# Altium PCB PCB1.PcbDoc
Units mm, origin at the board's own origin, x right, y up, seen from the top; angles counter-clockwise.
Board outline 174.12 x 136.86 mm, 2 copper layers (Top Layer, Bottom Layer); 102 components, 82 nets, 295 pads, 74 vias.
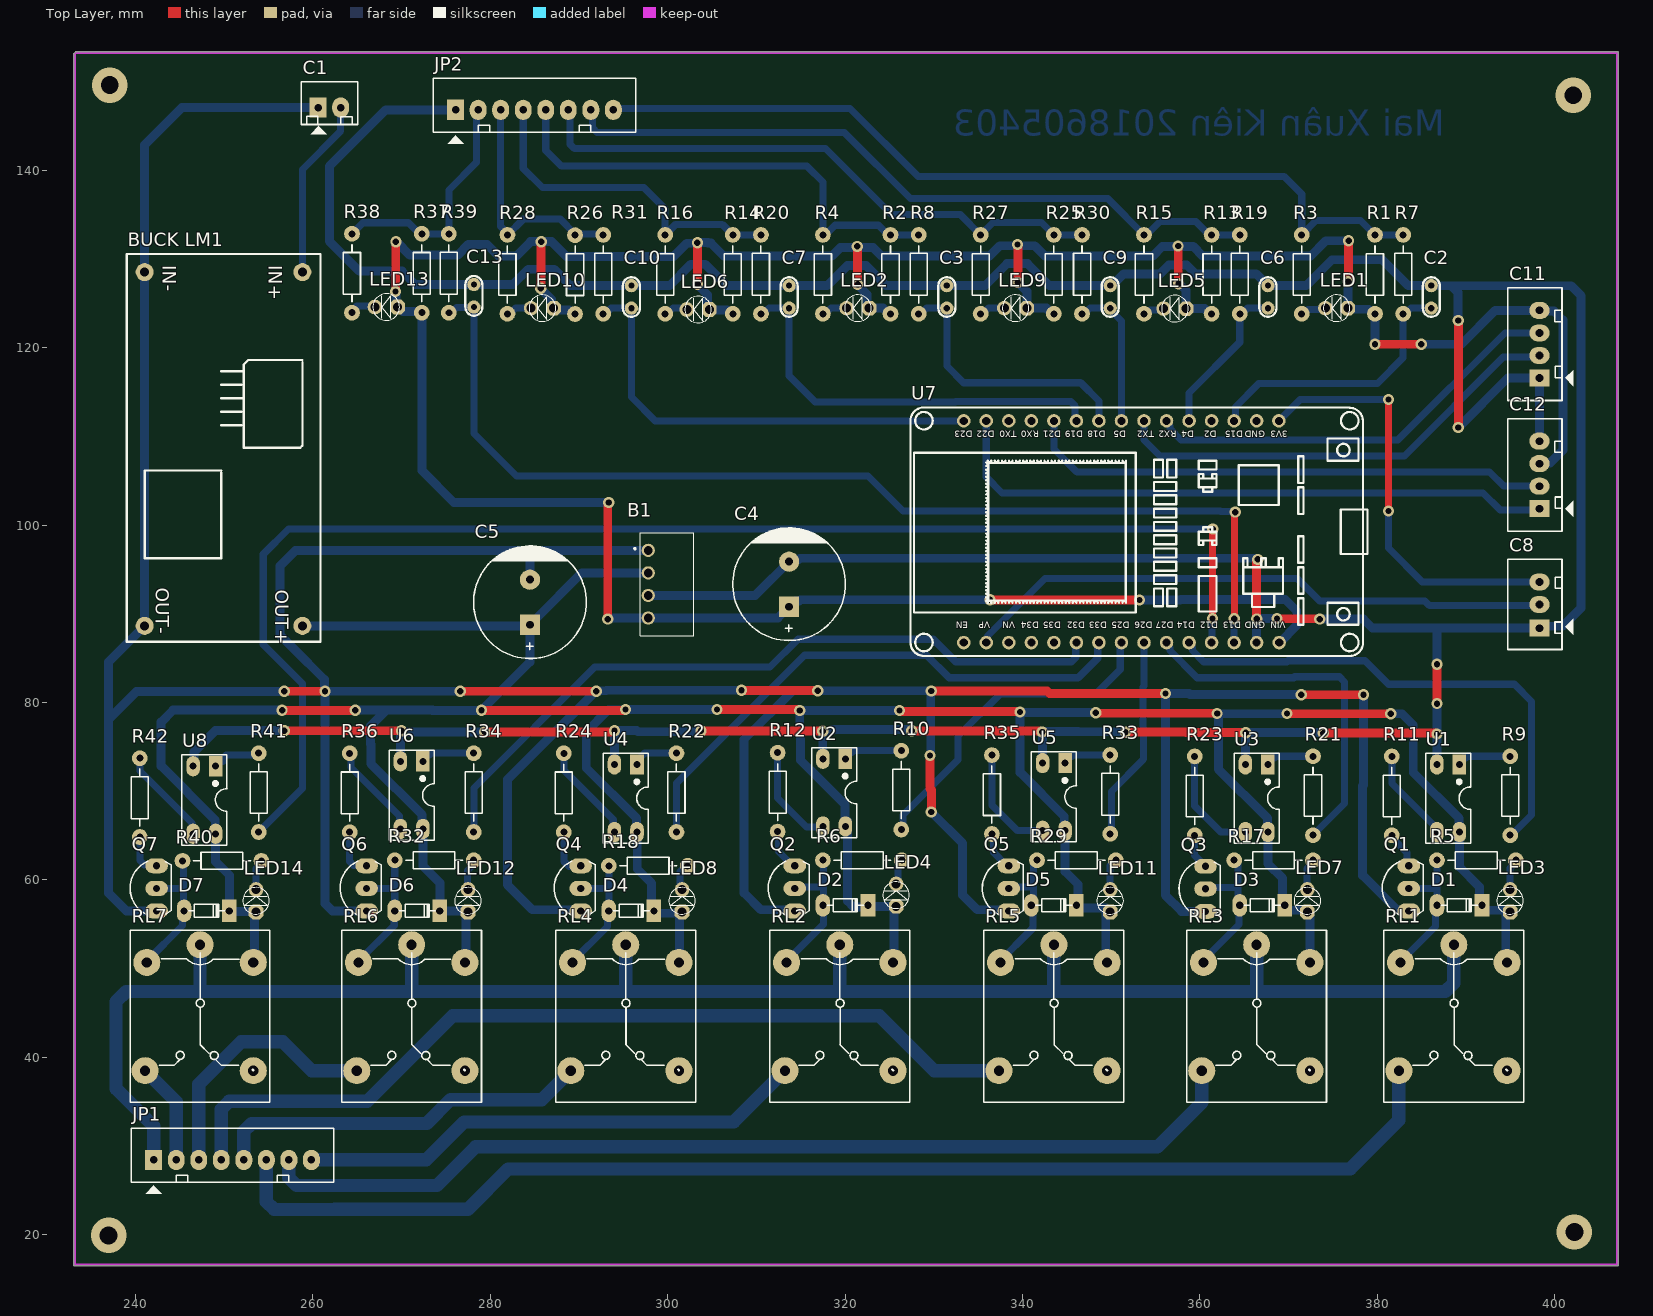
[diagram p0: Top Layer view]
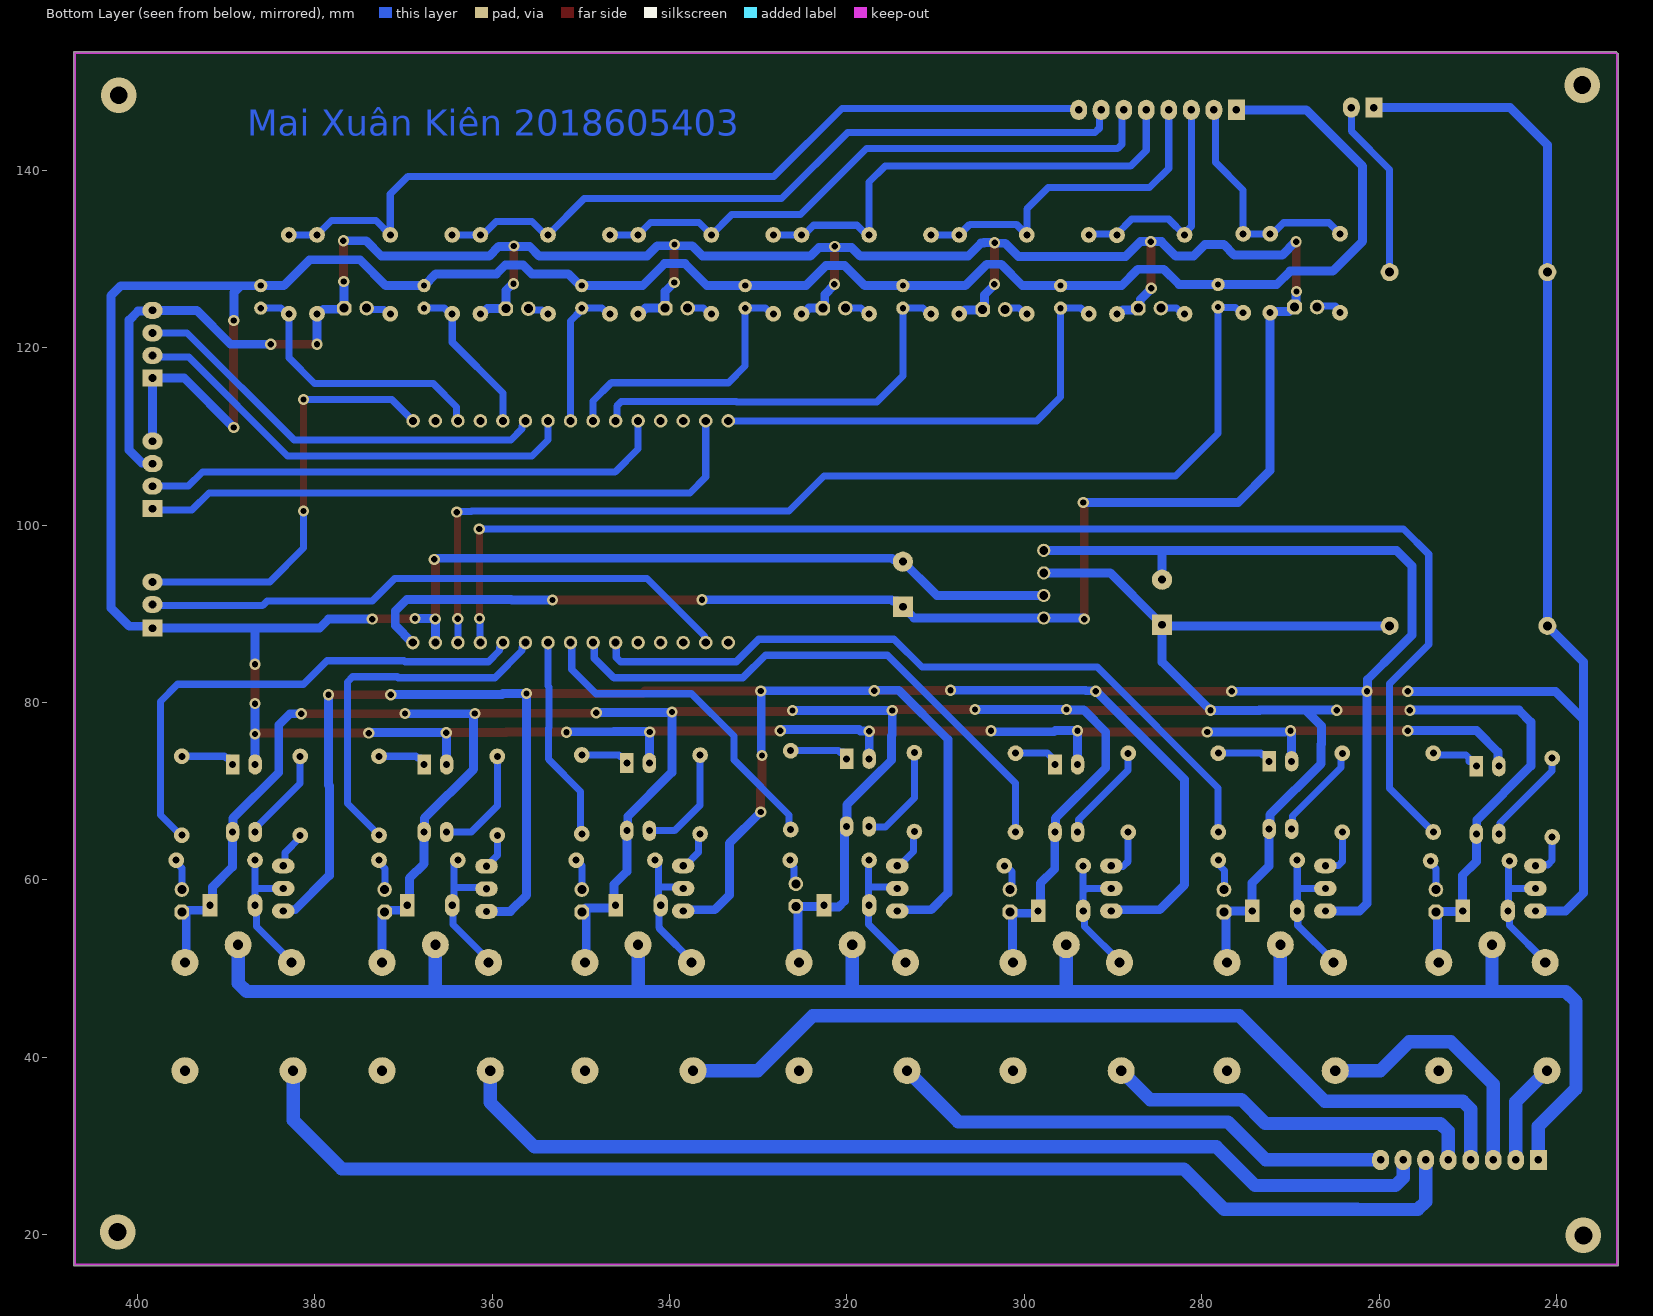
[diagram p1: Bottom Layer view, seen from below]
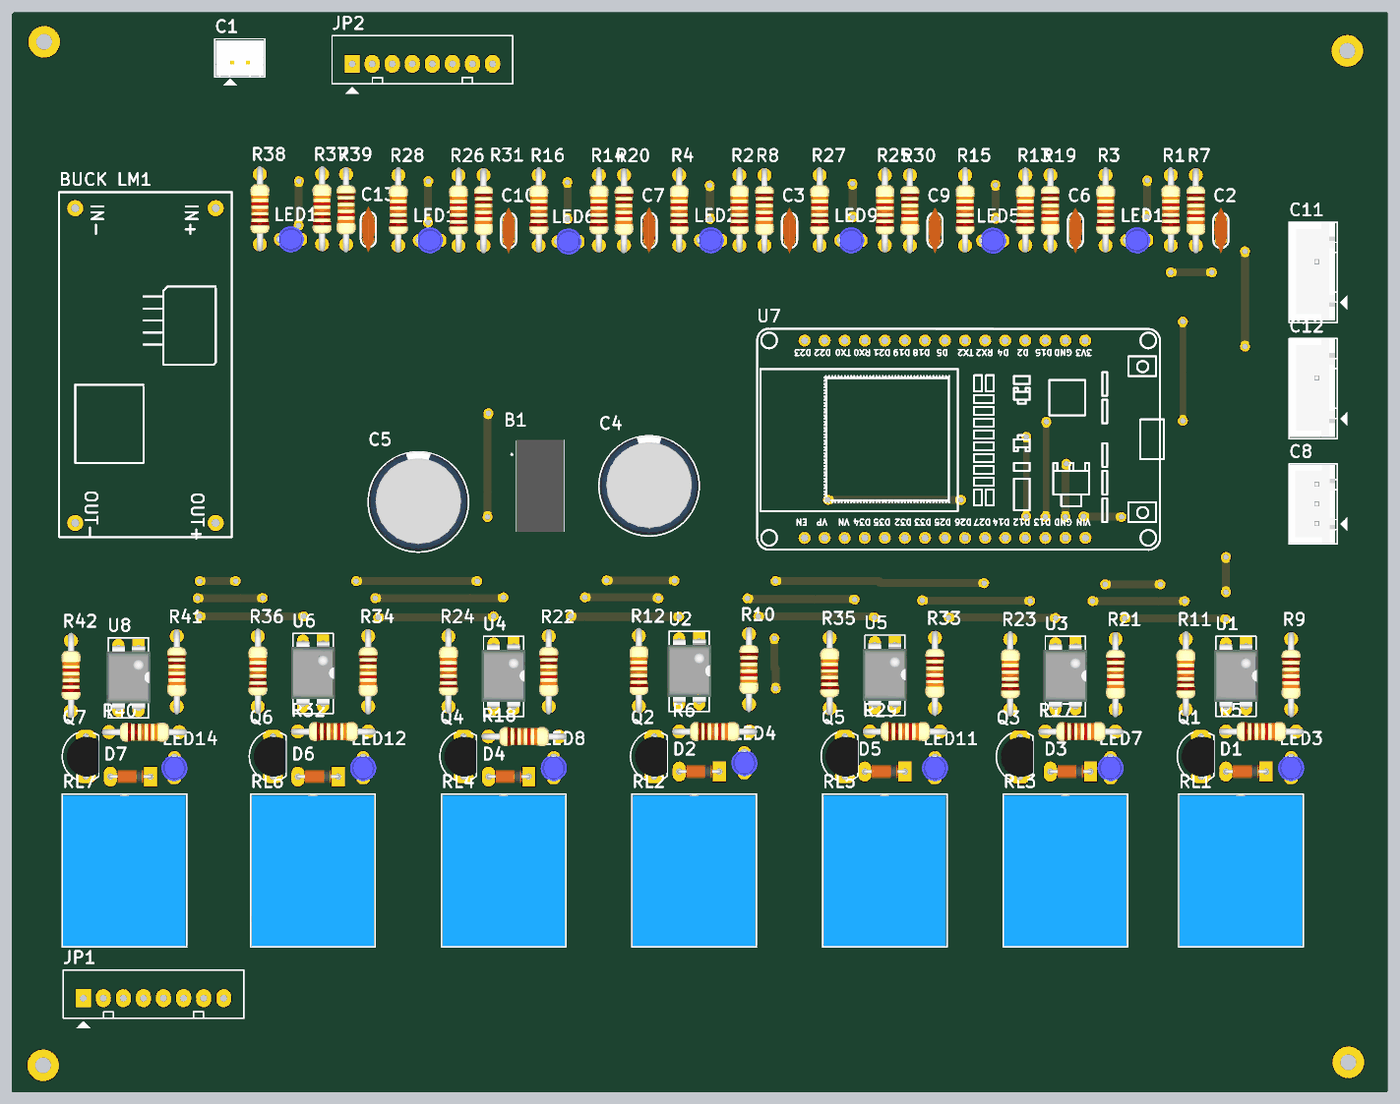
[diagram p2: 3D render of the assembled board from above, using the file's embedded part models]

## Layer stack, top to bottom
Top Solder: solder mask 0.0102, Solder Resist, Dk 3.5
Top Layer: signal copper 0.0356
Dielectric 1: dielectric 0.32, FR-4, Dk 4.8
Bottom Layer: signal copper 0.0356
Bottom Solder: solder mask 0.0102, Solder Resist, Dk 3.5

## Board outline
233.045,16.637 ccw(c233.172,16.637) 233.172,16.51 407.035,16.51 ccw(c407.035,16.637) 407.162,16.637 407.162,153.243 ccw(c407.035,153.243) 407.035,153.371 233.345,153.371 ccw(c233.345,153.243) 233.254,153.333 233.082,153.16 ccw(c233.171,153.071) 233.045,153.07

## Design rules (kind name [scope] priority, off if disabled: settings)
Clearance [All] p1: gap=1 ignorepadtopadclearanceinfootprint=FALSE
PolygonConnect [All] p1: connectstyle=Relief reliefconductorwidth=0.254 reliefentries=4 polygonreliefangle="90 Angle" airgapwidth=0.254
RoutingVias [All] p1: holewidth=0.711 width=1.27 viastyle="Through Hole" minholewidth=0.711 minwidth=1.27 maxholewidth=0.711 maxwidth=1.27
SolderMaskExpansion [All] p1: expansion=0.102 istentingtop=FALSE
Width RL_OUT [((InNet('OUT_RL0') OR InNet('OUT_RL1') OR InNet('OUT_RL2') OR InNet('OUT_RL3') OR InNet('OUT_RL4') OR InNet('OUT_RL5') OR InNet('OUT_RL6')))] p1: maxlimit=1.5 minlimit=1.5 preferedwidth=1.5
Width GND_ISO [InNet('GND_ISO')] p2: maxlimit=1 minlimit=1 preferedwidth=1
Width COM_O [InNet('COM_O')] p3: maxlimit=1.5 minlimit=1.5 preferedwidth=1.5
Width VCC_ISO [InNet('VCC5_ISO')] p4: maxlimit=1 minlimit=1 preferedwidth=1
Width GND [InNet('GND')] p5: maxlimit=1 minlimit=1 preferedwidth=1
Width VCC [InNet('VCC5')] p6: maxlimit=1 minlimit=1 preferedwidth=1
Width SIGNAL [All] p7: maxlimit=0.8 minlimit=0.8 preferedwidth=0.8
30 further rules are at their usual default settings.

## Components (designator, comment, footprint, x,y, rotation, side; value= is the part's Value field where it differs from the comment)
B1 "B0505S1W" B0505S1W 297.815,97.155 r270 top
"BUCK LM1" "Buck LM2596" "BUCK LM2596" 250.698,108.966 r270 top
C1 "Header2" Header2 260.604,147.066 r0 top
C2 "104" "tu gom" 386.08,125.73 r90 top
C3 "104" "tu gom" 331.47,125.73 r90 top
C4 "Cap Pol3" CP2/5 313.69,90.805 r90 top value=C?
C5 "Cap Pol3" CP2/5 284.48,88.773 r90 top value=C?
C6 "104" "tu gom" 367.665,125.73 r90 top
C7 "104" "tu gom" 313.69,125.73 r90 top
C8 "ADC1" Header3 398.272,88.519 r90 top
C9 "104" "tu gom" 349.885,125.73 r90 top
C10 "104" "tu gom" 295.91,125.73 r90 top
C11 "UART2" Header4 398.272,116.586 r90 top
C12 "LCD_I2C" Header4 398.272,101.854 r90 top
C13 "104" "tu gom" 278.155,125.854 r90 top
D1 "100v" "DIODE 0.5A" 389.255,57.15 r180 top
D2 "100v" "DIODE 0.5A" 320.04,57.15 r180 top
D3 "100v" "DIODE 0.5A" 367.03,57.15 r180 top
D4 "100v" "DIODE 0.5A" 295.91,56.515 r180 top
D5 "100v" "DIODE 0.5A" 343.535,57.15 r180 top
D6 "100v" "DIODE 0.5A" 271.78,56.515 r180 top
D7 "100v" "DIODE 0.5A" 248.031,56.515 r180 top
JP1 "JP8" Header8 242.062,28.448 r0 top value="Connector 8"
JP2 "JP8" Header8 276.098,146.812 r0 top value="Connector 8"
LED1 "LED 3mm" LED-3MM-BLUE 375.285,124.46 r180 top
LED2 "LED 3mm" LED-3MM-BLUE 321.31,124.46 r180 top
LED3 "LED 3mm" LED-3MM-BLUE 394.97,57.785 r90 top
LED4 "LED 3mm" LED-3MM-BLUE 325.755,58.42 r90 top
LED5 "LED 3mm" LED-3MM-BLUE 357.048,124.409 r180 top
LED6 "LED 3mm" LED-3MM-BLUE 303.301,124.308 r180 top
LED7 "LED 3mm" LED-3MM-BLUE 372.11,57.785 r90 top
LED8 "LED 3mm" LED-3MM-BLUE 301.625,57.785 r90 top
LED9 "LED 3mm" LED-3MM-BLUE 339.09,124.46 r180 top
LED10 "LED 3mm" LED-3MM-BLUE 285.75,124.46 r180 top
LED11 "LED 3mm" LED-3MM-BLUE 349.885,57.785 r90 top
LED12 "LED 3mm" LED-3MM-BLUE 277.495,57.785 r90 top
LED13 "LED 3mm" LED-3MM-BLUE 268.148,124.586 r180 top
LED14 "LED 3mm" LED-3MM-BLUE 253.602,57.785 r90 top
Q1 "C1815" C1815_cam 383.54,59.055 r90 top
Q2 "C1815" C1815_cam 314.325,59.055 r90 top
Q3 "C1815" C1815_cam 360.629,59.004 r90 top
Q4 "C1815" C1815_cam 290.195,59.055 r90 top
Q5 "C1815" C1815_cam 338.455,59.055 r90 top
Q6 "C1815" C1815_cam 266.065,59.055 r90 top
Q7 "C1815" C1815_cam 242.386,59.055 r90 top
R1 "10K" R1/4W 379.73,132.715 r270 top value="R1/4W - 1K"
R2 "10K" R1/4W 325.12,132.715 r270 top value="R1/4W - 1K"
R3 "220R" R1/4W 371.475,132.715 r270 top value="R1/4W - 1K"
R4 "220R" R1/4W 317.5,132.715 r270 top value="R1/4W - 1K"
R5 "510R" R1/4W 395.605,62.23 r180 top value="R1/4W - 1K"
R6 "510R" R1/4W 326.39,62.23 r180 top value="R1/4W - 1K"
R7 "1K" R1/4W 382.905,123.825 r90 top value="R1/4W - 1K"
R8 "1K" R1/4W 328.295,123.825 r90 top value="R1/4W - 1K"
R9 "100R" R1/4W 394.97,65.055 r90 top value="R1/4W - 1K"
R10 "100R" R1/4W 326.339,65.687 r90 top value="R1/4W - 1K"
R11 "510R" R1/4W 381.635,73.929 r270 top value="R1/4W - 1K"
R12 "510R" R1/4W 312.395,74.346 r270 top value="R1/4W - 1K"
R13 "10K" R1/4W 361.315,132.715 r270 top value="R1/4W - 1K"
R14 "10K" R1/4W 307.34,132.715 r270 top value="R1/4W - 1K"
R15 "220R" R1/4W 353.695,132.715 r270 top value="R1/4W - 1K"
R16 "220R" R1/4W 299.72,132.715 r270 top value="R1/4W - 1K"
R17 "510R" R1/4W 372.745,62.23 r180 top value="R1/4W - 1K"
R18 "510R" R1/4W 302.26,61.595 r180 top value="R1/4W - 1K"
R19 "1K" R1/4W 364.49,123.825 r90 top value="R1/4W - 1K"
R20 "1K" R1/4W 310.515,123.825 r90 top value="R1/4W - 1K"
R21 "100R" R1/4W 372.745,65.055 r90 top value="R1/4W - 1K"
R22 "100R" R1/4W 300.99,65.405 r90 top value="R1/4W - 1K"
R23 "510R" R1/4W 359.41,73.929 r270 top value="R1/4W - 1K"
R24 "510R" R1/4W 288.29,74.28 r270 top value="R1/4W - 1K"
R25 "10K" R1/4W 343.535,132.715 r270 top value="R1/4W - 1K"
R26 "10K" R1/4W 289.56,132.691 r270 top value="R1/4W - 1K"
R27 "220R" R1/4W 335.28,132.715 r270 top value="R1/4W - 1K"
R28 "220R" R1/4W 281.94,132.715 r270 top value="R1/4W - 1K"
R29 "510R" R1/4W 350.52,62.23 r180 top value="R1/4W - 1K"
R30 "1K" R1/4W 346.71,123.825 r90 top value="R1/4W - 1K"
R31 "1K" R1/4W 292.735,123.825 r90 top value="R1/4W - 1K"
R32 "510R" R1/4W 278.13,62.23 r180 top value="R1/4W - 1K"
R33 "100R" R1/4W 349.885,65.205 r90 top value="R1/4W - 1K"
R34 "100R" R1/4W 278.13,65.405 r90 top value="R1/4W - 1K"
R35 "510R" R1/4W 336.55,74.079 r270 top value="R1/4W - 1K"
R36 "510R" R1/4W 264.16,74.28 r270 top value="R1/4W - 1K"
R37 "10K" R1/4W 272.288,132.842 r270 top value="R1/4W - 1K"
R38 "220R" R1/4W 264.414,132.842 r270 top value="R1/4W - 1K"
R39 "1K" R1/4W 275.336,123.942 r90 top value="R1/4W - 1K"
R40 "510R" R1/4W 254.203,62.154 r180 top value="R1/4W - 1K"
R41 "100R" R1/4W 253.898,65.405 r90 top value="R1/4W - 1K"
R42 "510R" R1/4W 240.504,73.731 r270 top value="R1/4W - 1K"
RL1 "Relay" RELAY_SRA_05VDC_SL_C 388.62,52.705 r270 top
RL2 "Relay" RELAY_SRA_05VDC_SL_C 319.405,52.705 r270 top
RL3 "Relay" RELAY_SRA_05VDC_SL_C 366.395,52.705 r270 top
RL4 "Relay" RELAY_SRA_05VDC_SL_C 295.275,52.705 r270 top
RL5 "Relay" RELAY_SRA_05VDC_SL_C 343.535,52.705 r270 top
RL6 "Relay" RELAY_SRA_05VDC_SL_C 271.145,52.705 r270 top
RL7 "Relay" RELAY_SRA_05VDC_SL_C 247.289,52.705 r270 top
U1 "PC817" DIP4/W0.3 389.255,73.028 r180 top
U2 "PC817" DIP4/W0.3 320.04,73.66 r180 top
U3 "PC817" DIP4/W0.3 367.665,73.028 r180 top
U4 "PC817" DIP4/W0.3 296.545,73.025 r180 top
U5 "PC817" DIP4/W0.3 344.805,73.178 r180 top
U6 "PC817" DIP4/W0.3 272.415,73.378 r180 top
U7 "ESP32_MODULE copy" ESP32-WIFIMODULE-FOOTPRINT 352.889,101.388 r90 top
U8 "PC817" DIP4/W0.3 249.047,72.829 r180 top

## Footprints (in the part's own frame and the unit in brackets; to place one, negate y for a bottom-side part, rotate by r counter-clockwise, add the part's x,y. Pads: shape width x height; smd on the part's side, far side on the other; paste and mask are expansions set on the pad)
B0505S1W [mm]
  round 1.5 hole 1: 1(0,0) 2(2.54,0) 3(5.08,0) 4(7.62,0)
  silkscreen extent -1.99,-1.6 9.61,5.1, body extent -1.99,-0.9 9.61,5.1, height 10.1
"BUCK LM2596" [mil]
  round 80 hole 40: 1(-770,320) 2(-770,-380) 3(800,-380) 4(800,320)
  silkscreen extent -850,-460 870,400
C1815_cam [mil]
  oval 66x100 hole 32: 1(-100,0) 2(0,0) 3(100,0)
  silkscreen extent -117,-65 120,118, body extent -109,-66 109,95, height 245
CP2/5 [mil]
  rect 90x90 hole 35: 1(0,0)
  round 90 hole 35: 2(200,0)
  silkscreen extent -150,-250 350,250, body extent -142,-246 350,246, height 984
"DIODE 0.5A" [mil] "Diode muoi, xung"
  oval 65x100 hole 32: 1(100,0)
  rect 65x100 hole 32: 2(-100,0)
  silkscreen extent -80,-30 80,28, body extent -108,-33 108,32, height 61
DIP4/W0.3 [mil]
  rect 60x90 hole 31: 1(0,0)
  oval 60x90 hole 31: 2(100,0) 3(100,300) 4(0,300)
  silkscreen extent -50,-50 150,350, body extent -59,-10 159,305, height 170
ESP32-WIFIMODULE-FOOTPRINT [mil]
  round 60 hole 36: 1(-575.9,768.25) 2(-575.9,668.25) 3(-575.9,568.25) 4(-575.9,468.25) 5(-575.9,368.25) 6(-575.9,268.25) 7(-575.9,168.25) 8(-575.9,68.25) 9(-575.9,-31.75) 10(-575.9,-131.75) 11(-575.9,-231.75) 12(-575.9,-331.75) 13(-575.9,-431.75) 14(-575.9,-531.75) 15(-575.9,-631.75) 16(408.35,-630.18) 17(408.35,-531.75) 18(408.35,-431.75) 19(408.35,-331.75) 20(408.35,-231.75) 21(408.35,-131.75) 22(408.35,-31.75) 23(408.35,68.25) 24(408.35,168.25) 25(408.35,268.25) 26(408.35,368.25) 27(408.35,468.25) 28(408.35,568.25) 29(408.35,668.25) 30(408.35,768.25)
  silkscreen extent -635,-1023 468,1005
Header2 [mil] "CON2"
  rect 75x90 hole 34: 1(0,0)
  oval 75x90 hole 34: 2(100,0)
  silkscreen extent -75,-118 175,115, body extent -68,-70 168,107, height 236
Header3 [mil] "CON 3"
  rect 75x90 hole 34: 1(-5,0)
  oval 75x90 hole 34: 2(100,0) 3(200,0)
  silkscreen extent -100,-150 300,140, body extent -95,-90 295,136, height 276
Header4 [mil] "CON4"
  rect 75x90 hole 34: 1(0,0)
  oval 75x90 hole 34: 2(100,0) 3(200,0) 4(300,0)
  silkscreen extent -100,-150 400,140, body extent -90,-90 398,136, height 276
Header8 [mil] "CON8"
  rect 75x90 hole 34: 1(0,0)
  oval 75x90 hole 34: 2(100,0) 3(200,0) 4(300,0) 5(400,0) 6(500,0) 7(600,0) 8(700,0)
  silkscreen extent -100,-150 800,140
LED-3MM-BLUE [mil]
  oct 65x65 hole 40: 1(-55,0)
  round 65 hole 40: 2(45,0)
  silkscreen extent -64,-59 54,59, body extent -72,-65 54,65, height 184
R1/4W [mil]
  round 70 hole 31: 1(0,0) 2(350,0)
  silkscreen extent 48,-38 302,38, body extent -40,-47 386,47, height 111
RELAY_SRA_05VDC_SL_C [mil] "Relay SPDT, 5 pin, 10A,W 650mil, L 800mil, H 800mil"
  round 120 hole 45: 1(559.06,-243.78) 2(559.06,236.22) 3(78.74,236.22) 4(0,0) 5(78.74,-236.22)
  silkscreen extent -63,-311 700,310, body extent -55,-306 697,304, height 602
"tu gom" [mm] "Tu gom mini"
  round 1.5 hole 0.7: 1(-1.27,0) 2(1.27,0)
  silkscreen extent -2.25,-0.97 2.22,0.97, body extent -2.92,-0.85 2.92,0.85, height 6.12

## Part data
B1: "Power Supply", Manufacturer_Name=Mornsun, Manufacturer_Part_Number=B0505S-1W, Datasheet Link=https://www.mornsun-power.com/uploads/pdf/B_D-1W.pdf, Height=10.41mm
C1: "Header IDC, 2 x 1 Pin Vertical 2.54mm Pitch (Non-Boxed, Male)", Manufacturer="W¨¹rth Elektronik eiSos GmbH", partNo=613002143121, ComponentLink1 Description=Manufacturer, ComponentLink1URL=http://www.we-online.com, ComponentLink2 Description=Datasheet, ComponentLink2URL=http://katalog.we-online.de/em/datasheet/6130xx143121.pdf, Created by="Karrer Zheng", Created Date="29 March 2013", NoPins=02
C2 C3 C6 C7 C9 C10 C13: library part "Tu gom 104 50V", "Cắm", Chung_Loai=Cắm, Don_Vi=Con, Ma_Hang=MH004761, So_Chan=2, Ten_Linh_Kien="Tụ gốm 104 100nF 50V"
C4 C5: "Polarized Capacitor (Surface Mount)", LatestRevisionDate=17-Jul-2002, LatestRevisionNote="Re-released for DXP Platform.", PackageReference=C0805, Publisher="Altium Limited"
C8: library part Header3, "Header IDC, 3 x 1 Pin Vertical 2.54mm Pitch (Non-Boxed, Male)", Manufacturer="W¨¹rth Elektronik eiSos GmbH", partNo=613002143121, ComponentLink1 Description=Manufacturer, ComponentLink1URL=http://www.we-online.com, ComponentLink2 Description=Datasheet, ComponentLink2URL=http://katalog.we-online.de/em/datasheet/6130xx143121.pdf, Created by="Karrer Zheng", Created Date="29 March 2013", NoPins=02
C11 C12: library part Header4, "Header IDC, 4 x 1 Pin Vertical 2.54mm Pitch (Non-Boxed, Male)", Manufacturer="W¨¹rth Elektronik eiSos GmbH", partNo=613002143121, ComponentLink1 Description=Manufacturer, ComponentLink1URL=http://www.we-online.com, ComponentLink2 Description=Datasheet, ComponentLink2URL=http://katalog.we-online.de/em/datasheet/6130xx143121.pdf, Created by="Karrer Zheng", Created Date="29 March 2013", NoPins=02
D1 D2 D3 D4 D5 D6 D7: library part "Diode 1N4148", "Cắm", Chung_Loai=Cắm, Don_Vi=Con, Ma_Hang=MH001065, Ten_Linh_Kien="Diode 1N4148 DO35 450mA 100V ( 1N4148 DIP)"
JP1 JP2: library part Header8, "Connector 8"
LED1 LED2 LED3 LED4 LED5 LED6 LED7 LED8 LED9 LED10 LED11 LED12 LED13 LED14: library part "LED 3mm Xanh Duong", "Cắm", Chung_Loai=Cắm, Don_Vi=Con, Ma_Hang=MH009003, Ten_Linh_Kien="LED 3MM Xanh Dương SS (1000c)"
Q1 Q2 Q3 Q4 Q5 Q6 Q7: "NPN 600mW, ECB"
R1 R2 R3 R4 R5 R6 R7 R8 R9 R10 R11 R12 R13 R14 R15 R16 R17 R18 R19 R20 R21 R22 R23 R24 R25 R26 R27 R28 R29 R30 R31 R32 R33 R34 R35 R36 R37 R38 R39 R40 R41 R42: library part R1/4W, "Resistor 1/4W"
RL1 RL2 RL3 RL4 RL5 RL6 RL7: library part RL_SRA-05VDC-SL-C, "Relay 5 Chan", Ma_Hang=MH009374, Ten="Relay 5V10A SRD-05VDC-SL-C Chính Hãng"
U1 U2 U3 U4 U5 U6 U8: "Single Opto"

## Via types
v1: diameter 1.27, hole 0.711, Top Layer to Bottom Layer, 70 vias
v2: diameter 4, hole 2, Top Layer to Bottom Layer, 4 vias

## Nets (pads, with @x,y where several pads share a name; then routed paths per layer and width w, separated by ;. In a path a pad name is that pad's centre, name@x,y a point inside that pad or via, vN(x,y) a via of type N, cw(c..) or ccw(c..) an arc to the next point about the centre after c; other vN are vias at no path point)
ADC1_0: C8.2 U7.2 | length 67
  Bottom Layer w0.8: U7.2 336.054,86.899 336.054,87.515 342.519,93.98 370.967,93.98 373.504,91.443 385.346,91.443 385.857,90.932 398.145,90.932 C8.2
COM_O: JP1.1 RL1.4 RL2.4 RL3.4 RL4.4 RL5.4 RL6.4 RL7.4 | length 207.3
  Bottom Layer w1.5: JP1.1 242.062,32.231 237.823,36.471 237.823,46.307 238.947,47.431 247.289,47.431 ; RL7.4 247.289,47.431 ; RL6.4 271.145,47.558 271.272,47.431 ; RL4.4 295.275,47.558 295.148,47.431 ; RL2.4 319.405,47.494 319.341,47.431 ; RL5.4 343.535,47.431 ; 366.395,47.498 RL3.4 ; RL1.4 388.62,48.377 387.674,47.431 366.395,47.431 343.535,47.431 ; 247.289,47.431 271.272,47.431 ; 271.272,47.431 295.148,47.431 ; 295.148,47.431 319.341,47.431 ; 319.341,47.431 343.535,47.431
GND: "BUCK LM1.2" "BUCK LM1.3" B1.1 C1.1 C5.2 Q1.1 Q2.1 Q3.1 Q4.1 Q5.1 Q6.1 Q7.1 | length 503
  Top Layer w1: v1(256.794,81.28) v1(261.366,81.28) ; v1(276.606,81.28) v1(291.942,81.28) ; v1(308.331,81.382) 308.356,81.356 316.89,81.356 v1(316.916,81.331) ; v1(329.565,74.041) 329.565,70.297 329.721,70.14 v1(329.721,67.662) ; v1(329.699,81.305) 342.744,81.305 343.024,81.026 v1(356.108,81.026) ; v1(371.422,80.875) v1(378.435,80.875)
  Bottom Layer w1: Q7.1 238.989,56.515 236.982,58.522 236.982,78.105 ; v1(256.794,81.28) 256.743,81.229 240.106,81.229 236.982,78.105 ; C1.1 245.237,147.066 241.046,142.875 241.046,128.524 241.046,88.646 236.982,84.582 236.982,78.105 ; Q6.1 262.206,56.515 261.366,57.355 v1(261.366,81.28) ; v1(276.606,81.28) v1(261.366,81.28) ; C5.2 284.48,97.155 ; Q4.1 290.066,56.644 284.757,56.644 281.94,59.461 281.94,71.308 291.912,81.28 v1(291.942,81.28) 291.994,81.332 293.041,81.332 293.092,81.383 308.206,81.383 308.207,81.382 v1(308.331,81.382) ; B1.1 284.48,97.155 ; Q2.1 314.196,56.644 310.513,56.644 308.61,58.547 308.61,75.841 314.15,81.382 316.865,81.382 v1(316.916,81.331) 329.574,81.331 329.6,81.305 v1(329.699,81.305) 329.651,81.257 329.651,74.2 329.565,74.114 v1(329.565,74.041) ; v1(329.721,67.662) 333.248,64.135 333.248,58.293 334.897,56.644 338.326,56.644 Q5.1 ; Q3.1 357.937,56.464 356.108,58.293 v1(356.108,81.026) 358.759,81.026 358.887,80.898 371.399,80.898 v1(371.422,80.875) ; v1(378.435,80.875) 378.435,70.7 378.333,70.599 378.333,60.523 382.212,56.644 383.541,56.644 Q1.1@383.576,56.609 ; v1(261.366,81.28) 261.314,81.332 261.314,82.602 257.786,86.13 257.784,86.13 256.31,87.604 256.31,95.401 258.064,97.155 284.48,97.155
GND_ISO: B1.3 C2.2 C3.2 C4.2 C6.2 C7.2 C8.1 C9.2 C10.2 C11.1 C12.4 C13.2 JP2.1 U1.2 U2.2 U3.2 U4.2 U5.2 U6.2 U7.14 U8.2 | length 542.2
  Top Layer w1: v1(256.794,76.835) 256.804,76.825 269.992,76.825 v1(270.002,76.816) ; v1(279.376,76.684) 293.781,76.684 293.932,76.835 v1(294.005,76.835) ; v1(303.757,76.834) 303.807,76.784 317.463,76.784 v1(317.489,76.759) ; v1(327.516,76.81) 341.921,76.81 341.997,76.734 342.188,76.734 v1(342.24,76.683) ; v1(351.617,76.663) 358.368,76.663 358.426,76.605 v1(365.154,76.605) ; v1(366.395,89.432) 366.395,95.939 366.522,96.066 v1(366.522,96.139) ; v1(368.684,89.484) 368.722,89.446 373.469,89.446 v1(373.507,89.408) ; v1(373.893,76.557) 386.539,76.557 386.642,76.454 v1(386.715,76.454) ; v1(386.715,79.883) v1(386.715,84.328) ; v1(389.128,110.998) v1(389.128,123.063)
  Bottom Layer w1: U8.2 246.607,72.93 246.607,74.416 249.026,76.835 v1(256.794,76.835) ; U6.2@269.875,73.66 269.875,76.616 270.002,76.743 v1(270.002,76.816) ; v1@270.609,76.684 v1(279.376,76.684) ; JP2.1 268.224,146.812 261.874,140.462 261.874,132.003 265.244,128.633 270.045,128.633 271.555,127.124 C13.2 282.556,127.124 284.281,128.85 287.194,128.85 289.044,127 C10.2 300.212,127 302.625,129.413 304.241,129.413 306.654,127 C7.2 317.992,127 320.279,129.287 322.341,129.287 324.628,127 C3.2 335.772,127 338.263,129.491 340.552,129.491 343.043,127 C9.2 350.02,127 C9.2@350.116,127.096 ; U4.2 v1(294.005,76.835) 296.513,76.835 296.64,76.708 303.559,76.708 303.684,76.834 v1(303.757,76.834) ; B1.3 309.88,92.075 313.936,96.131 314.784,96.131 314.919,96.266 366.204,96.266 366.279,96.191 366.47,96.191 v1(366.522,96.139) ; U2.2@317.5,74.562 317.489,74.573 v1(317.489,76.759) 317.541,76.81 318.472,76.81 318.628,76.966 327.287,76.966 327.442,76.81 v1(327.516,76.81) ; U5.2 342.252,73.19 342.252,76.67 v1(342.24,76.683) 342.289,76.732 346.28,76.732 346.304,76.708 349.142,76.708 351.572,76.708 v1(351.617,76.663) ; C9.2@350.338,127.25 351.414,128.326 355.513,128.326 356.524,129.337 358.486,129.337 359.497,128.326 366.339,128.326 C6.2 371.967,127 374.887,129.92 380.57,129.92 383.489,127 C2.2 386.101,126.979 388.33,126.979 ; U3.2 365.14,73.042 365.14,76.59 v1(365.154,76.605) ; v1@365.14,76.613 365.154,76.628 373.749,76.628 373.819,76.557 v1(373.893,76.557) ; U7.14 v1(366.395,89.432) 366.421,89.458 368.658,89.458 v1(368.684,89.484) ; v1(373.507,89.408) 378.44,89.408 379.439,88.409 386.715,88.409 ; U1.2@386.715,73.66 v1(386.715,76.454) v1(386.715,79.883) ; v1(386.715,84.328) 386.715,88.409 ; v1(389.128,110.998) 394.716,116.586 C11.1 C12.4 ; v1(389.128,123.063) 389.103,123.088 389.103,126.206 388.33,126.979 ; 386.715,88.409 386.736,88.388 394.695,88.388 394.699,88.392 C8.1 398.486,88.606 400.899,88.606 402.971,90.678 402.971,125.857 401.849,126.979 388.33,126.979
IN_0: C13.1 R39.1 U7.13 | length 121.7
  Top Layer w0.8: U7.13 U7.13@363.918,86.823 ; v1(363.855,89.433) 363.918,89.497 363.918,101.406 v1(363.982,101.47)
  Bottom Layer w0.8: R39.1 275.601,123.942 276.205,124.547 278.118,124.547 C13.1 278.155,110.338 282.956,105.537 322.58,105.537 326.517,101.6 362.285,101.6 362.325,101.56 363.892,101.56 v1(363.982,101.47) ; U7.13 v1(363.855,89.433)
IN_1: C2.1 R7.1 U7.18 | length 31.2
  Bottom Layer w0.8: U7.18 363.994,111.899 363.994,113.335 366.632,115.973 380.006,115.973 382.902,118.869 382.902,121.239 382.905,121.242 R7.1 383.17,123.825 383.805,124.46 C2.1
IN_2: C6.1 R19.1 U7.20 | length 17.9
  Bottom Layer w0.8: U7.20 358.775,114.901 364.49,120.616 R19.1 364.755,123.825 365.39,124.46 C6.1
IN_3: C9.1 R30.1 U7.23 | length 16.7
  Bottom Layer w0.8: R30.1 346.975,123.825 347.61,124.46 C9.1 349.885,124.271 351.155,123.001 U7.23
IN_4: C3.1 R8.1 U7.24 | length 31
  Bottom Layer w0.8: R8.1 328.56,123.825 329.195,124.46 C3.1 331.47,117.932 333.35,116.053 346.558,116.053 348.615,113.995 U7.24
IN_5: C7.1 R20.1 U7.25 | length 46.5
  Bottom Layer w0.8: R20.1 310.78,123.825 311.415,124.46 C7.1 313.69,116.84 316.636,113.894 332.451,113.894 332.479,113.922 345.439,113.922 345.936,113.425 345.936,111.899 U7.25
IN_6: C10.1 R31.1 U7.30 | length 52
  Bottom Layer w0.8: R31.1 293,123.825 293.635,124.46 C10.1 295.91,114.427 298.577,111.76 U7.30
"NetBUCK LM1_1": "BUCK LM1.1" C1.2 | length 20.3
  Bottom Layer w0.8: 258.826,128.524 258.826,140.101 263.144,144.419 C1.2
NetD1_1: D1.1 Q1.2 R5.2 RL1.5 | length 16.6
  Bottom Layer w0.8: RL1.5@382.479,50.534 382.479,50.699 386.552,54.772 D1.1@386.552,57.15 ; Q1.2 383.565,59.03 386.715,59.03 ; D1.1 386.715,59.03 ; R5.2 386.715,59.03
NetD2_1: D2.1 Q2.2 R6.2 RL2.5 | length 16.4
  Bottom Layer w0.8: RL2.5@313.509,50.754 313.509,50.944 317.576,55.011 317.576,59.411 ; Q2.2@314.39,59.225 317.39,59.225 317.576,59.411 ; R6.2@317.576,62.205 317.576,59.411
NetD3_1: D3.1 Q3.2 R17.2 RL3.5 | length 17.2
  Bottom Layer w0.8: RL3.5@359.963,50.398 359.963,50.534 364.414,54.984 364.414,57.04 364.286,57.169 364.286,59.106 ; Q3.2@361.06,59.149 364.243,59.149 364.286,59.106 ; R17.2@364.157,62.362 364.286,62.233 364.286,59.106
NetD4_1: D4.1 Q4.2 R18.2 RL4.5 | length 16
  Bottom Layer w0.8: RL4.5@289.077,50.534 289.077,50.643 293.207,54.772 293.207,56.602 D4.1@293.116,56.693 ; Q4.2 293.13,59.055 293.13,58.928 ; D4.1 R18.2
NetD5_1: D5.1 Q5.2 R29.2 RL5.5 | length 16.6
  Bottom Layer w0.8: RL5.5@337.236,50.5 337.236,50.635 341.097,54.496 341.097,54.588 341.173,54.664 341.173,57.117 341.249,57.193 341.249,59.284 ; Q5.2@338.333,59.225 341.19,59.225 341.249,59.284 ; R29.2@341.325,62.463 341.249,62.387 341.249,59.284
NetD6_1: D6.1 Q6.2 R32.2 RL6.5 | length 16.3
  Bottom Layer w0.8: RL6.5@265.107,50.802 269.175,54.871 269.175,56.45 D6.1 269.24,59.03 ; Q6.2 266.09,59.03 269.24,59.03 ; R32.2 269.24,59.03
NetD7_1: D7.1 Q7.2 R40.2 RL7.5 | length 16.3
  Bottom Layer w0.8: RL7.5 241.289,50.84 245.328,54.88 245.328,56.352 D7.1 245.402,56.604 245.402,59.055 ; Q7.2 245.402,59.055 ; R40.2 245.402,62.065 245.402,59.055
NetLED1_2: LED1.2 R3.2 | length 2.9
  Bottom Layer w0.8: R3.2 371.74,123.825 372.212,124.297 373.979,124.297 LED1.2
NetLED2_2: LED2.2 R4.2 | length 2.9
  Bottom Layer w0.8: R4.2 317.765,123.825 318.4,124.46 LED2.2
NetLED3_2: LED3.2 R5.1 | length 3.6
  Bottom Layer w0.8: LED3.2 394.97,61.33 395.605,61.965 R5.1
NetLED4_2: LED4.2 R6.1 | length 3
  Bottom Layer w0.8: LED4.2@325.822,59.487 325.985,59.65 325.985,61.459 326.466,61.94 R6.1@326.466,62.205
NetLED5_2: LED5.2 R15.2 | length 2.5
  Bottom Layer w0.8: R15.2 353.96,123.825 354.381,124.246 355.742,124.246 LED5.2
NetLED6_2: LED6.2 R16.2 | length 2.7
  Bottom Layer w0.8: R16.2 299.985,123.825 300.62,124.46 LED6.2@302.157,124.46
NetLED7_2: LED7.2 R17.1 | length 3.6
  Bottom Layer w0.8: LED7.2 372.059,58.979 372.059,61.28 372.745,61.965 R17.1
NetLED8_2: LED8.2 R18.1 | length 3.3
  Bottom Layer w0.8: LED8.2@301.39,58.788 301.39,60.94 302.034,61.584 R18.1@302.034,61.849
NetLED9_2: LED9.2 R27.2 | length 2.9
  Bottom Layer w0.8: R27.2 335.545,123.825 336.18,124.46 LED9.2
NetLED10_2: LED10.2 R28.2 | length 2.9
  Bottom Layer w0.8: R28.2 282.205,123.825 282.84,124.46 LED10.2
NetLED11_2: LED11.2 R29.1 | length 3.5
  Bottom Layer w0.8: LED11.2 349.885,61.633 350.333,62.081 R29.1@350.215,62.199
NetLED12_2: LED12.2 R32.1 | length 3.3
  Bottom Layer w0.8: LED12.2@277.42,58.915 277.42,61.067 278.064,61.711 R32.1@278.064,61.976
NetLED13_2: LED13.2 R38.2 | length 3.1
  Bottom Layer w0.8: R38.2 264.414,124.206 264.922,124.714 266.877,124.714 LED13.2
NetLED14_2: LED14.2 R40.1 | length 3.5
  Bottom Layer w0.8: LED14.2 253.602,61.288 254.203,61.889 R40.1
NetQ1_3: Q1.3 R11.2 | length 4.2
  Bottom Layer w0.8: R11.2 381.635,64.775 383.32,63.089 383.32,61.815 Q1.3
NetQ2_3: Q2.3 R12.2 | length 4.7
  Bottom Layer w0.8: R12.2@312.509,65.456 312.509,63.215 313.959,61.765 Q2.3@314.39,61.765
NetQ3_3: Q3.3 R23.2 | length 4.1
  Bottom Layer w0.8: R23.2 359.41,62.763 360.03,62.144 360.03,61.949 360.435,61.544 Q3.3
NetQ4_3: Q4.3 R24.2 | length 5.5
  Bottom Layer w0.8: R24.2@288.293,65.382 288.293,62.111 288.895,61.509 290.007,61.509 Q4.3@290.175,61.341
NetQ5_3: Q5.3 R35.2 | length 4.5
  Bottom Layer w0.8: R35.2 336.737,65.002 336.737,63.118 338.26,61.595 Q5.3
NetQ6_3: Q6.3 R36.2 | length 5.8
  Bottom Layer w0.8: 264.135,63.403 264.135,62.104 264.603,61.636 266.036,61.636 Q6.3@266.204,61.468 ; 264.135,63.404 264.135,65.269 R36.2@264.323,65.456
NetQ7_3: Q7.3 R42.2 | length 4.8
  Bottom Layer w0.8: R42.2 240.504,62.191 240.973,61.722 242.259,61.722 Q7.3
NetR9_2: R9.2 U1.1 | length 6.3
  Bottom Layer w0.8: U1.1 389.255,73.409 389.617,73.771 389.998,73.771 390.172,73.945 R9.2
NetR10_2: R10.2 U2.1 | length 6.9
  Bottom Layer w0.8: U2.1 320.04,74.041 320.402,74.403 320.783,74.403 320.957,74.577 R10.2
NetR11_1: R11.1 U1.3 | length 10.6
  Bottom Layer w0.8: R11.1 381.635,70.869 386.715,65.789 U1.3
NetR12_1: R12.1 U2.3 | length 11.6
  Bottom Layer w0.8: R12.1 312.369,74.32 312.369,69.24 315.646,65.964 317.166,65.964 317.242,66.04 U2.3
NetR21_2: R21.2 U3.1 | length 5.7
  Bottom Layer w0.8: U3.1 367.665,73.409 368.027,73.771 368.408,73.771 368.582,73.945 R21.2
NetR22_2: R22.2 U4.1 | length 5.2
  Bottom Layer w0.8: U4.1 296.907,73.387 296.907,73.826 297.376,74.295 R22.2
NetR23_1: R23.1 U3.3 | length 12.5
  Bottom Layer w0.8: R23.1 359.41,68.345 362.347,65.408 U3.3
NetR24_1: R24.1 U4.3 | length 11.2
  Bottom Layer w0.8: R24.1@288.293,74.272 288.315,74.249 288.315,72.365 293.866,66.814 293.866,65.544 U4.3
NetR33_2: R33.2 U5.1 | length 5.7
  Bottom Layer w0.8: U5.1 344.805,73.559 345.167,73.921 345.548,73.921 345.722,74.095 R33.2
NetR34_2: R34.2 U6.1 | length 6.3
  Bottom Layer w0.8: U6.1 272.415,73.759 272.777,74.121 273.158,74.121 273.332,74.295 R34.2
NetR35_1: R35.1 U5.3 | length 12.5
  Bottom Layer w0.8: R35.1 336.55,68.427 339.419,65.558 341.931,65.558 341.931,65.476 U5.3@342.062,65.345
NetR36_1: R36.1 U6.3 | length 10.9
  Bottom Layer w0.8: R36.1@264.323,74.346 264.323,72.664 269.774,67.212 269.774,65.859 U6.3
NetR41_2: R41.2 U8.1 | length 4.6
  Bottom Layer w0.8: 249.86,73.378 249.86,73.746 250.222,74.108 253.711,74.108 R41.2
NetR42_1: R42.1 U8.3 | length 11
  Bottom Layer w0.8: R42.1 240.504,72.271 246.368,66.407 246.368,65.348 U8.3
OUT_0: R41.1 U7.12 | length 156.3
  Top Layer w0.8: U7.12 U7.12@361.378,86.823 ; v1(361.417,89.484) 361.429,89.497 361.429,99.552 v1(361.442,99.565)
  Bottom Layer w0.8: R41.1 258.829,70.336 258.829,82.123 254.41,86.542 254.41,96.721 257.254,99.565 v1(361.442,99.565) ; U7.12 361.366,86.811 361.366,89.433 v1(361.417,89.484)
OUT_1: R9.1 U7.11 | length 57.9
  Bottom Layer w0.8: U7.11 358.775,86.564 359.153,86.186 359.153,85.864 360.419,84.598 369.831,84.598 369.943,84.71 378.592,84.71 381.237,82.064 395.456,82.064 397.383,80.137 397.383,67.329 395.108,65.055 R9.1
OUT_2: R21.1 U7.10 | length 41
  Bottom Layer w0.8: U7.10 356.235,86.564 356.613,86.186 356.613,85.859 359.674,82.798 370.576,82.798 370.688,82.91 375.717,82.91 376.298,82.329 376.298,68.608 R21.1
OUT_3: R33.1 U7.9 | length 22.8
  Bottom Layer w0.8: R33.1@350.027,65.345 350.027,69.838 ; 350.027,69.992 353.652,73.617 353.652,77.107 353.587,77.172 353.587,81.745 353.695,81.852 U7.9
OUT_4: R10.1 U7.8 | length 37.7
  Bottom Layer w0.8: R10.1@326.339,65.684 326.526,65.872 326.526,67.345 332.74,73.558 332.74,76.225 337.513,80.998 348.282,80.998 351.016,83.732 351.016,86.621 U7.8
OUT_5: R22.1 U7.7 | length 62.7
  Bottom Layer w0.8: R22.1 300.99,70.908 315.421,85.339 329.193,85.339 331.734,82.798 346.276,82.798 348.476,84.999 348.476,86.621 U7.7
OUT_6: R34.1 U7.6 | length 82.7
  Bottom Layer w0.8: R34.1@277.984,65.524 278.169,65.709 278.169,70.385 291.782,83.998 311.534,83.998 314.675,87.139 329.938,87.139 332.479,84.598 345.53,84.598 345.999,85.067 345.999,86.684 U7.6
OUT_BTN_0: JP2.2 R37.1 R38.1 R39.2 | length 27.3
  Bottom Layer w0.8: R38.1 265.663,134.091 270.774,134.091 272.023,132.842 R37.1 272.293,132.837 275.331,132.837 R39.2 275.336,137.795 278.451,140.91 278.451,146.625 JP2.2
OUT_BTN_1: JP2.8 R1.1 R3.1 R7.2 | length 99
  Bottom Layer w0.8: JP2.8 294.027,146.961 320.572,146.961 328.214,139.319 369.494,139.319 371.475,137.338 R3.1 373.101,134.341 378.104,134.341 R1.1 R7.2
OUT_BTN_2: JP2.7 R13.1 R15.1 R19.2 | length 81.3
  Bottom Layer w0.8: JP2.7 291.338,146.322 291.549,146.111 291.549,144.738 292.018,144.269 294.852,144.269 294.855,144.272 319.913,144.272 327.381,136.804 349.606,136.804 R15.1 353.96,132.715 355.484,134.239 359.526,134.239 361.05,132.715 R19.2
OUT_BTN_3: JP2.6 R25.1 R27.1 R30.2 | length 67.1
  Bottom Layer w0.8: JP2.6 288.798,146.322 289.009,146.111 289.009,142.938 289.478,142.469 306.959,142.469 306.962,142.472 317.776,142.472 325.244,135.004 332.991,135.004 R27.1 336.677,134.112 342.138,134.112 R25.1 R30.2
OUT_BTN_4: JP2.5 R2.1 R4.1 R8.2 | length 54.7
  Bottom Layer w0.8: JP2.5 286.258,142.24 288.036,140.462 315.722,140.462 317.5,138.684 R4.1 ; R4.1@317.765,132.715 318.857,133.807 323.763,133.807 324.855,132.715 R8.2
OUT_BTN_5: JP2.4 R14.1 R16.1 R20.2 | length 39.2
  Bottom Layer w0.8: JP2.4 283.718,140.208 285.877,138.049 297.307,138.049 299.72,135.636 R16.1 300.914,133.909 306.146,133.909 R14.1 R20.2
OUT_BTN_6: JP2.3 R26.1 R28.1 R31.2 | length 26.8
  Bottom Layer w0.8: JP2.3 281.178,133.673 281.94,132.911 R28.1 283.713,134.488 287.909,134.488 R26.1@289.56,132.837 ; R26.1 R26.1@289.56,132.837 ; R31.2 292.613,132.837 R26.1@289.56,132.837
OUT_RL0: JP1.2 RL7.1 | length 11.5
  Bottom Layer w1.5: RL7.1 244.602,35 JP1.2
OUT_RL1: JP1.6 RL1.1 | length 142.5
  Bottom Layer w1.5: JP1.6 254.762,23.739 255.641,22.86 262.424,22.86 262.464,22.9 277.494,22.9 282.026,27.432 376.936,27.432 382.428,32.924 RL1.1
OUT_RL2: JP1.7 RL3.1 | length 112.7
  Bottom Layer w1.5: JP1.7 257.302,26.434 258.181,25.555 273.967,25.555 278.344,29.932 355.22,29.932 360.203,34.915 RL3.1
OUT_RL3: JP1.4 RL5.1 | length 100.3
  Bottom Layer w1.5: JP1.4 249.682,30.734 249.682,34.173 250.561,35.052 266.13,35.052 274.574,43.496 275.782,44.704 323.836,44.704 330.035,38.505 RL5.1
OUT_RL4: JP1.8 RL2.1 | length 57.5
  Bottom Layer w1.5: JP1.8 272.796,28.448 277.079,32.731 307.439,32.731 RL2.1
OUT_RL5: JP1.5 RL4.1 | length 42.9
  Bottom Layer w0.8: JP1.5 JP1.5@252.262,28.488
  Bottom Layer w1.5: JP1.5@252.222,28.488 252.222,31.673 253.101,32.552 272.836,32.552 275.515,35.231 285.809,35.231 RL4.1
OUT_RL6: JP1.3 RL6.1 | length 29.7
  Bottom Layer w1.5: JP1.3 247.142,36.988 251.933,41.779 256.596,41.779 259.87,38.505 RL6.1
RX2: C11.3 U7.21 | length 48.2
  Bottom Layer w0.8: U7.21 356.235,111.564 356.613,111.186 356.613,110.864 357.879,109.598 382.304,109.598 394.372,121.666 C11.3
SCL: C12.1 U7.29 | length 70.3
  Bottom Layer w0.8: U7.29 335.915,105.41 337.69,103.635 391.919,103.635 393.827,101.727 398.145,101.727 C12.1
SDA: C12.2 U7.26 | length 59.6
  Bottom Layer w0.8: U7.26 343.535,108.585 346.122,105.998 392.64,105.998 394.244,104.394 C12.2
TX2: C11.2 U7.22 | length 52.2
  Bottom Layer w0.8: U7.22 353.695,109.601 355.498,107.798 383.05,107.798 394.191,118.939 398.085,118.939 C11.2
VCC5: "BUCK LM1.4" B1.2 C5.1 D1.2 D2.2 D3.2 D4.2 D5.2 D6.2 D7.2 LED3.1 LED4.1 LED7.1 LED8.1 LED11.1 LED12.1 LED14.1 RL1.3 RL2.3 RL3.3 RL4.3 RL5.3 RL6.3 RL7.3 U1.4 U2.4 U3.4 U4.4 U5.4 U6.4 U8.4 | length 438.6
  Top Layer w1: v1(256.54,79.121) 264.772,79.121 v1(264.791,79.14) ; v1(279.019,79.121) 295.075,79.121 295.177,79.223 v1(295.25,79.223) ; v1(305.562,79.223) 314.684,79.223 314.811,79.096 v1(314.884,79.096) ; v1(326.136,79.101) 326.209,79.101 326.316,78.994 339.676,78.994 v1(339.725,78.945) ; v1(348.258,78.843) 348.298,78.803 361.895,78.803 v1(361.935,78.763) ; v1(369.824,78.763) 369.847,78.74 v1(381.508,78.74)
  Bottom Layer w1: RL7.3 253.445,50.862 253.445,56.231 LED14.1 253.538,56.451 250.635,56.451 D7.2 250.622,56.566 250.622,60.503 249.047,62.078 U8.4 249.007,65.249 249.007,66.749 242.893,72.863 242.893,77.793 244.245,79.145 v1@256.54,79.145 ; 258.826,88.646 283.837,88.646 C5.1@284.222,89.031 ; v1(264.791,79.14) 264.796,79.145 268.299,79.145 ; RL6.3@277.266,50.629 277.266,56.222 277.42,56.375 277.287,56.509 274.326,56.509 D6.2 274.32,59.69 272.415,61.595 U6.4 272.415,66.04 272.315,66.14 272.315,67.358 266.549,73.124 266.549,75.269 266.522,75.296 266.522,77.368 268.299,79.145 ; B1.2 290.322,94.615 285.123,89.416 C5.1 284.48,84.582 v1(279.019,79.121) 273.507,79.121 273.483,79.145 268.299,79.145 ; RL4.3@301.32,50.641 301.32,56.147 301.422,56.248 298.521,56.248 298.196,56.574 298.196,59.614 296.57,61.239 296.57,65.38 296.505,65.445 296.505,66.945 290.83,72.62 290.83,76.679 293.322,79.171 295.125,79.171 295.177,79.223 v1(305.562,79.223) ; U2.4@320.04,66.942 320,66.982 320,68.482 317.068,71.414 314.96,73.522 314.96,76.259 314.884,76.335 v1(314.884,79.096) 314.886,79.098 326.133,79.098 v1(326.136,79.101) ; U2.4@320.269,66.654 320.269,57.633 320.954,56.947 322.555,56.947 322.656,57.048 322.707,56.998 325.771,56.998 325.822,56.947 325.822,56.827 325.509,56.514 RL2.3@325.509,50.754 ; v1@339.725,78.867 348.234,78.867 v1(348.258,78.843) ; v1(339.725,78.945) 339.725,72.138 344.705,67.158 344.705,65.658 U5.4 344.805,60.96 346.253,59.512 D5.2@346.253,57.117 ; D5.2@346.253,56.863 349.436,56.863 LED11.1@349.606,56.693 ; RL5.3@349.377,50.641 349.377,55.933 349.4,55.956 LED11.1@349.4,56.567 ; v1(361.935,78.763) v1@362.077,78.621 ; v1(369.824,78.763) 369.801,78.74 362.387,78.74 362.368,78.721 362.177,78.721 v1@362.077,78.621 ; RL3.3 372.395,55.983 372.11,56.268 LED7.1 371.904,56.594 369.895,56.594 369.57,56.919 D3.2 369.316,57.404 369.316,60.198 367.665,61.849 U3.4 367.625,65.448 367.625,66.948 362.077,72.496 v1@362.077,78.621 ; v1(381.508,78.74) 382.778,78.74 384.048,77.47 384.048,72.115 389.215,66.948 389.215,65.448 U1.4 389.255,61.473 391.503,59.225 391.503,57.053 391.516,57.04 391.516,56.921 391.841,56.596 394.792,56.596 394.792,56.476 394.479,56.163 RL1.3@394.479,50.398
VCC5_ISO: B1.4 C4.1 C11.4 C12.3 LED1.1 LED2.1 LED5.1 LED6.1 LED9.1 LED10.1 LED13.1 R1.2 R2.2 R13.2 R14.2 R25.2 R26.2 R37.2 U7.15 | length 371.5
  Top Layer w1: v1(269.328,126.331) 269.347,126.351 269.347,131.933 v1(269.367,131.953) ; v1(285.697,126.715) 285.723,126.741 285.723,131.926 v1(285.75,131.953) ; v1(293.243,89.408) 293.243,102.238 293.305,102.3 293.305,102.491 v1(293.356,102.543) ; v1(303.352,131.826) 303.364,131.814 303.364,127.158 v1(303.377,127.145) ; v1(321.361,131.422) 321.412,131.372 v1(321.412,127.152) ; v1(336.334,91.58) 336.34,91.573 353.181,91.573 v1(353.187,91.567) ; v1(339.446,131.626) 339.471,131.6 v1(339.471,127.356) ; v1(357.539,131.472) 357.56,131.451 357.56,127.223 v1(357.581,127.202) ; v1(376.707,127.457) 376.733,127.483 376.733,132.029 v1(376.758,132.055) ; v1(379.73,120.396) v1(384.937,120.396)
  Bottom Layer w1: v1(269.328,126.331) 269.379,126.28 269.379,124.751 LED13.1 269.665,124.586 270.15,124.101 272.139,124.101 R37.2 272.288,106.172 275.917,102.543 v1(293.356,102.543) ; v1(269.367,131.953) 269.44,131.953 270.95,130.443 276.326,130.443 277.529,131.646 279.63,131.646 280.95,130.326 282.93,130.326 284.557,131.953 v1(285.75,131.953) 286.919,131.953 288.57,130.302 300.685,130.302 302.158,131.774 303.286,131.774 303.352,131.841 304.529,131.841 304.566,131.804 304.872,131.804 306.35,130.326 318.49,130.326 319.451,131.287 323.169,131.287 324.13,130.326 336.27,130.326 337.434,131.491 341.381,131.491 342.545,130.326 354.685,130.326 355.779,131.42 357.487,131.42 v1(357.539,131.472) ; v1(285.697,126.715) 285.697,126.659 286.941,125.414 286.941,124.666 287.353,124.254 288.896,124.254 289.349,123.801 R26.2 ; v1(293.243,89.408) 293.316,89.408 293.443,89.535 312.42,89.535 C4.1 314.333,91.448 314.8,91.448 314.944,91.592 336.321,91.592 v1(336.334,91.58) ; v1(303.377,127.145) 303.377,127.072 304.493,125.956 304.493,124.633 304.62,124.506 304.881,124.506 305.133,124.254 306.7,124.254 307.129,123.825 R14.2 ; v1(321.412,127.152) 321.412,127.079 322.501,125.99 322.501,124.666 LED2.1 324.274,124.46 324.909,123.825 R2.2 ; v1(339.471,127.356) 340.487,126.34 LED9.1 342.689,124.46 343.324,123.825 R25.2 ; v1(353.187,91.567) 353.31,91.567 353.312,91.568 357.781,91.568 357.832,91.619 369.616,91.619 370.918,90.318 370.918,88.698 368.979,86.76 U7.15 ; v1@357.539,131.446 357.565,131.42 359.231,131.42 360.325,130.326 372.465,130.326 374.193,132.055 v1(376.758,132.055) ; v1(357.581,127.202) 357.633,127.15 357.744,127.15 358.427,126.467 358.427,124.735 358.445,124.717 LED5.1 360.52,124.409 361.104,123.825 R13.2 ; v1(376.707,127.457) 376.682,127.432 LED1.1 376.805,124.337 379.007,124.337 379.519,123.825 R1.2 v1(379.73,120.396) ; v1(384.937,120.396) 389.48,120.396 393.29,124.206 C11.4 398.359,124.119 399.909,124.119 400.915,123.112 400.915,108.458 399.478,107.021 398.359,107.021 C12.3
VCC33_ISO: C8.3 U7.16 | length 48.7
  Top Layer w0.8: v1(381.254,101.6) v1(381.254,114.173)
  Bottom Layer w0.8: U7.16 371.308,114.173 v1(381.254,114.173) ; v1(381.254,101.6) 381.254,97.409 385.064,93.599 C8.3
pads on no net: RL1.2 RL2.2 RL3.2 RL4.2 RL5.2 RL6.2 RL7.2 U7.1 U7.3 U7.4 U7.5 U7.17 U7.19 U7.27 U7.28
copper on no net:
  other v2: 236.982,19.939 402.209,20.32 402.082,148.463 237.109,149.606

## Keep-outs
Keep-Out Layer:
  lines w0.254: 233.172,16.637 400.939,16.637 407.035,16.637 407.035,153.243 233.345,153.243 233.172,153.07 233.172,150.622 233.172,16.637

## Other copper
Bottom Layer:
  text "Mai Xuân Kiên 2018605403" at 387.604,142.935 h5

## Text inside footprints (layer, text, board x,y; h text height)
"BUCK LM1": Top Overlay "IN+" at 255.016,129.286 h1.52 r270; Top Overlay "IN-" at 243.078,129.286 h1.52 r270; Top Overlay "OUT+" at 255.778,92.71 h1.52 r270; Top Overlay "OUT-" at 242.316,92.964 h1.52 r270
U7: Top Overlay "VIN" at 369.675,89.135 h0.75 r180; Top Overlay "GND" at 367.375,89.135 h0.75 r180; Top Overlay "D13" at 364.675,89.135 h0.75 r180; Top Overlay "D12" at 362.075,89.135 h0.75 r180; Top Overlay "D14" at 359.475,89.135 h0.75 r180; Top Overlay "D27" at 357.075,89.135 h0.75 r180; Top Overlay "D26" at 354.675,89.135 h0.75 r180; Top Overlay "D25" at 352.075,89.135 h0.75 r180; Top Overlay "D33" at 349.575,89.135 h0.75 r180; Top Overlay "D32" at 347.075,89.135 h0.75 r180; Top Overlay "D35" at 344.375,89.135 h0.75 r180; Top Overlay "D34" at 341.875,89.135 h0.75 r180; Top Overlay "VN" at 339.175,89.135 h0.75 r180; Top Overlay "VP" at 336.375,89.135 h0.75 r180; Top Overlay "EN" at 333.875,89.135 h0.75 r180; Top Overlay "3V3" at 369.875,110.635 h0.75 r180; Top Overlay "GND" at 367.375,110.635 h0.75 r180; Top Overlay "D15" at 364.875,110.635 h0.75 r180; Top Overlay "D2" at 361.875,110.635 h0.75 r180; Top Overlay "D4" at 359.375,110.635 h0.75 r180; Top Overlay "RX2" at 357.375,110.635 h0.75 r180; Top Overlay "TX2" at 354.875,110.635 h0.75 r180; Top Overlay "D5" at 351.675,110.635 h0.75 r180; Top Overlay "D18" at 349.375,110.635 h0.75 r180; Top Overlay "D19" at 346.875,110.635 h0.75 r180; Top Overlay "D21" at 344.375,110.635 h0.75 r180; Top Overlay "RX0" at 341.875,110.635 h0.75 r180; Top Overlay "TX0" at 339.375,110.635 h0.75 r180; Top Overlay "D22" at 336.875,110.635 h0.75 r180; Top Overlay "D23" at 334.375,110.635 h0.75 r180